# Altium PCB Board.PcbDoc (part 1 of 4)
Units mm, origin at the board's own origin, x right, y up, seen from the top; angles counter-clockwise.
Board outline 88 x 92.5 mm, 2 copper layers (Top Layer, Bottom Layer); 85 components, 67 nets, 346 pads, 106 vias.
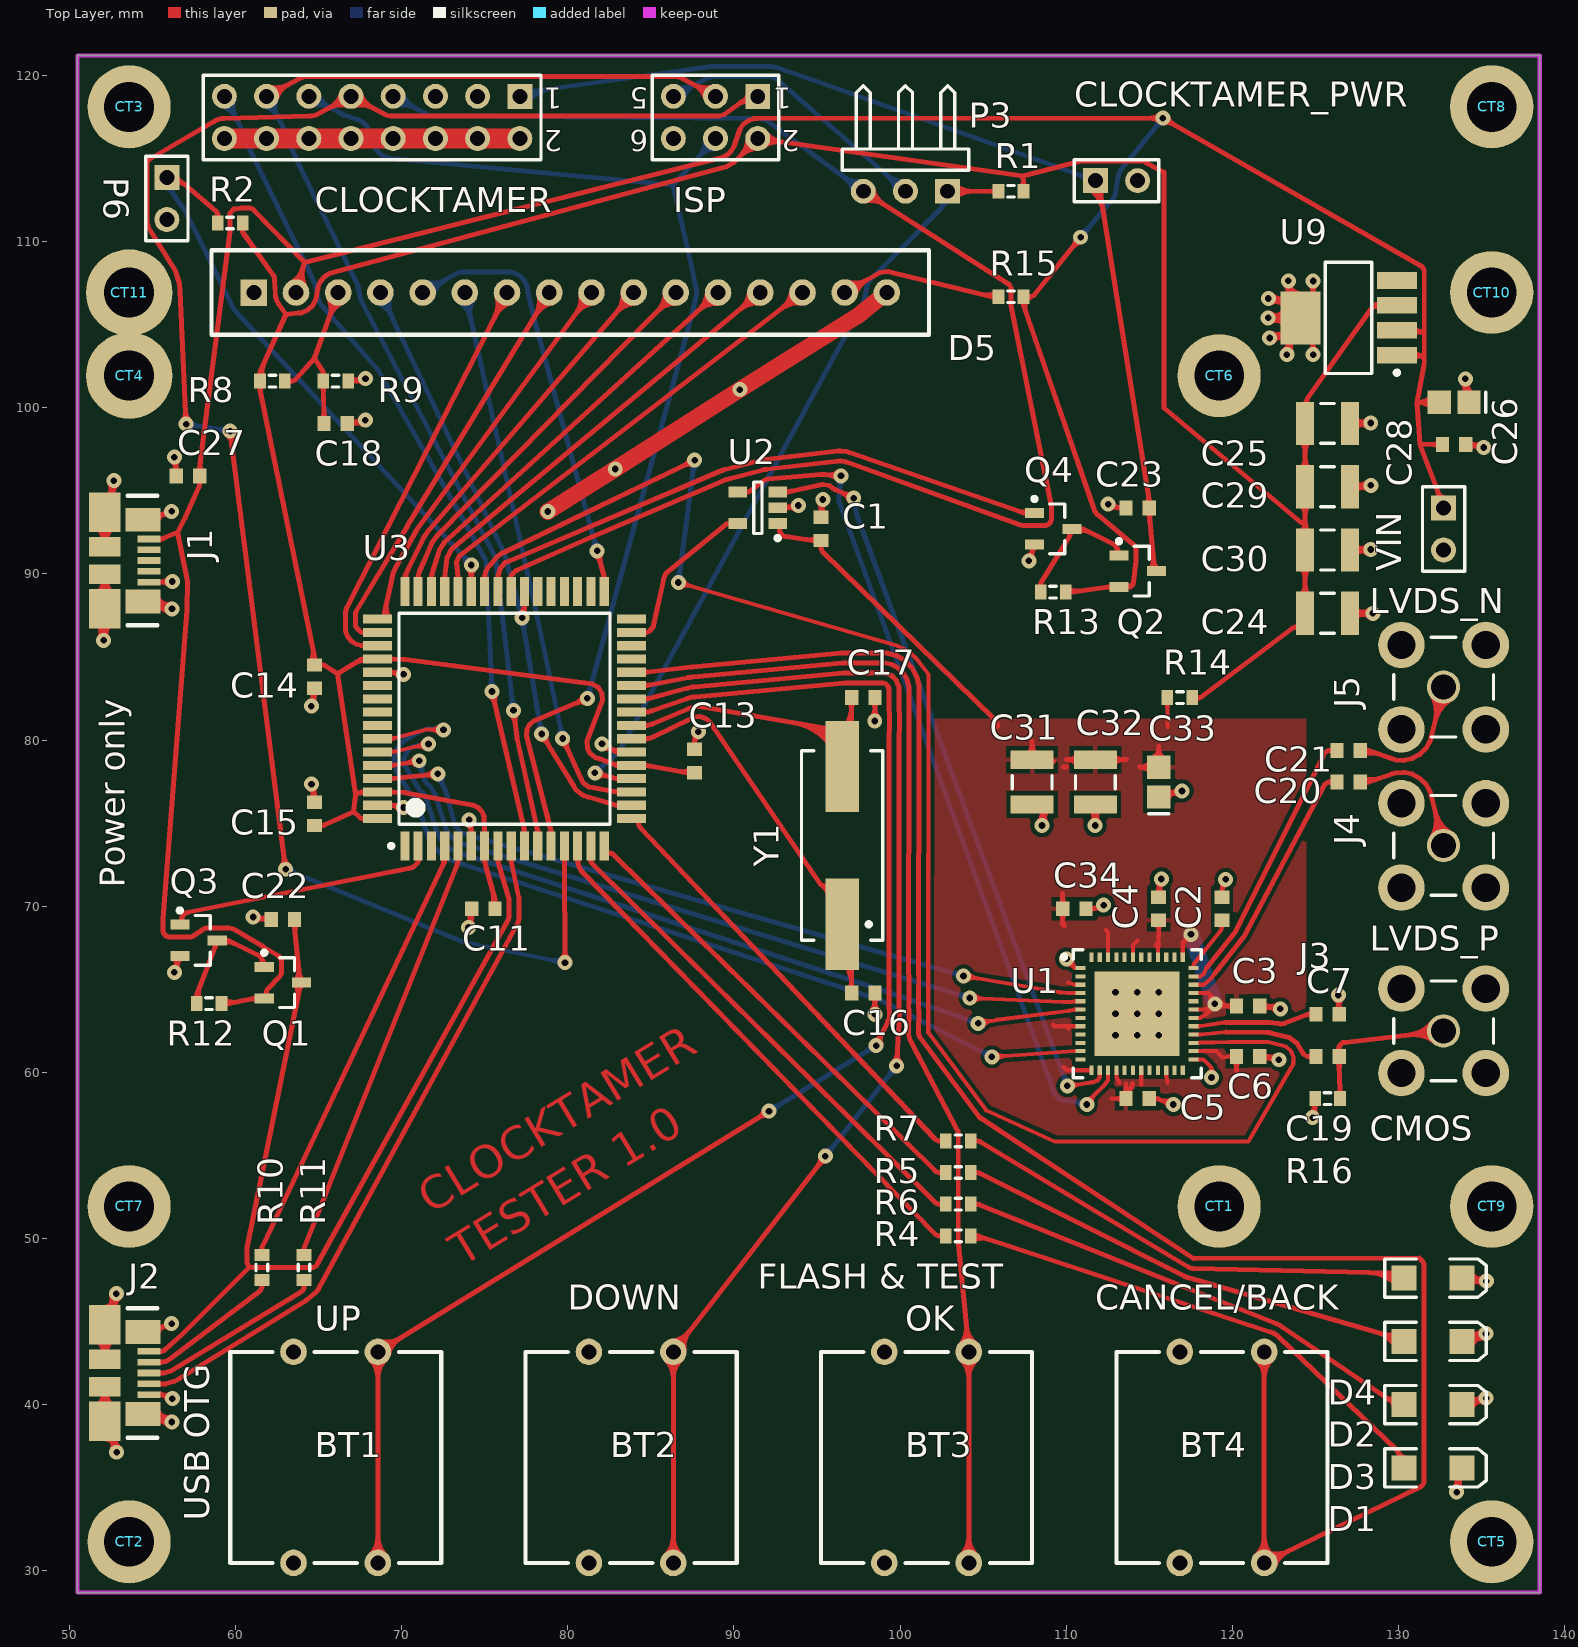
[diagram p0: Top Layer view]
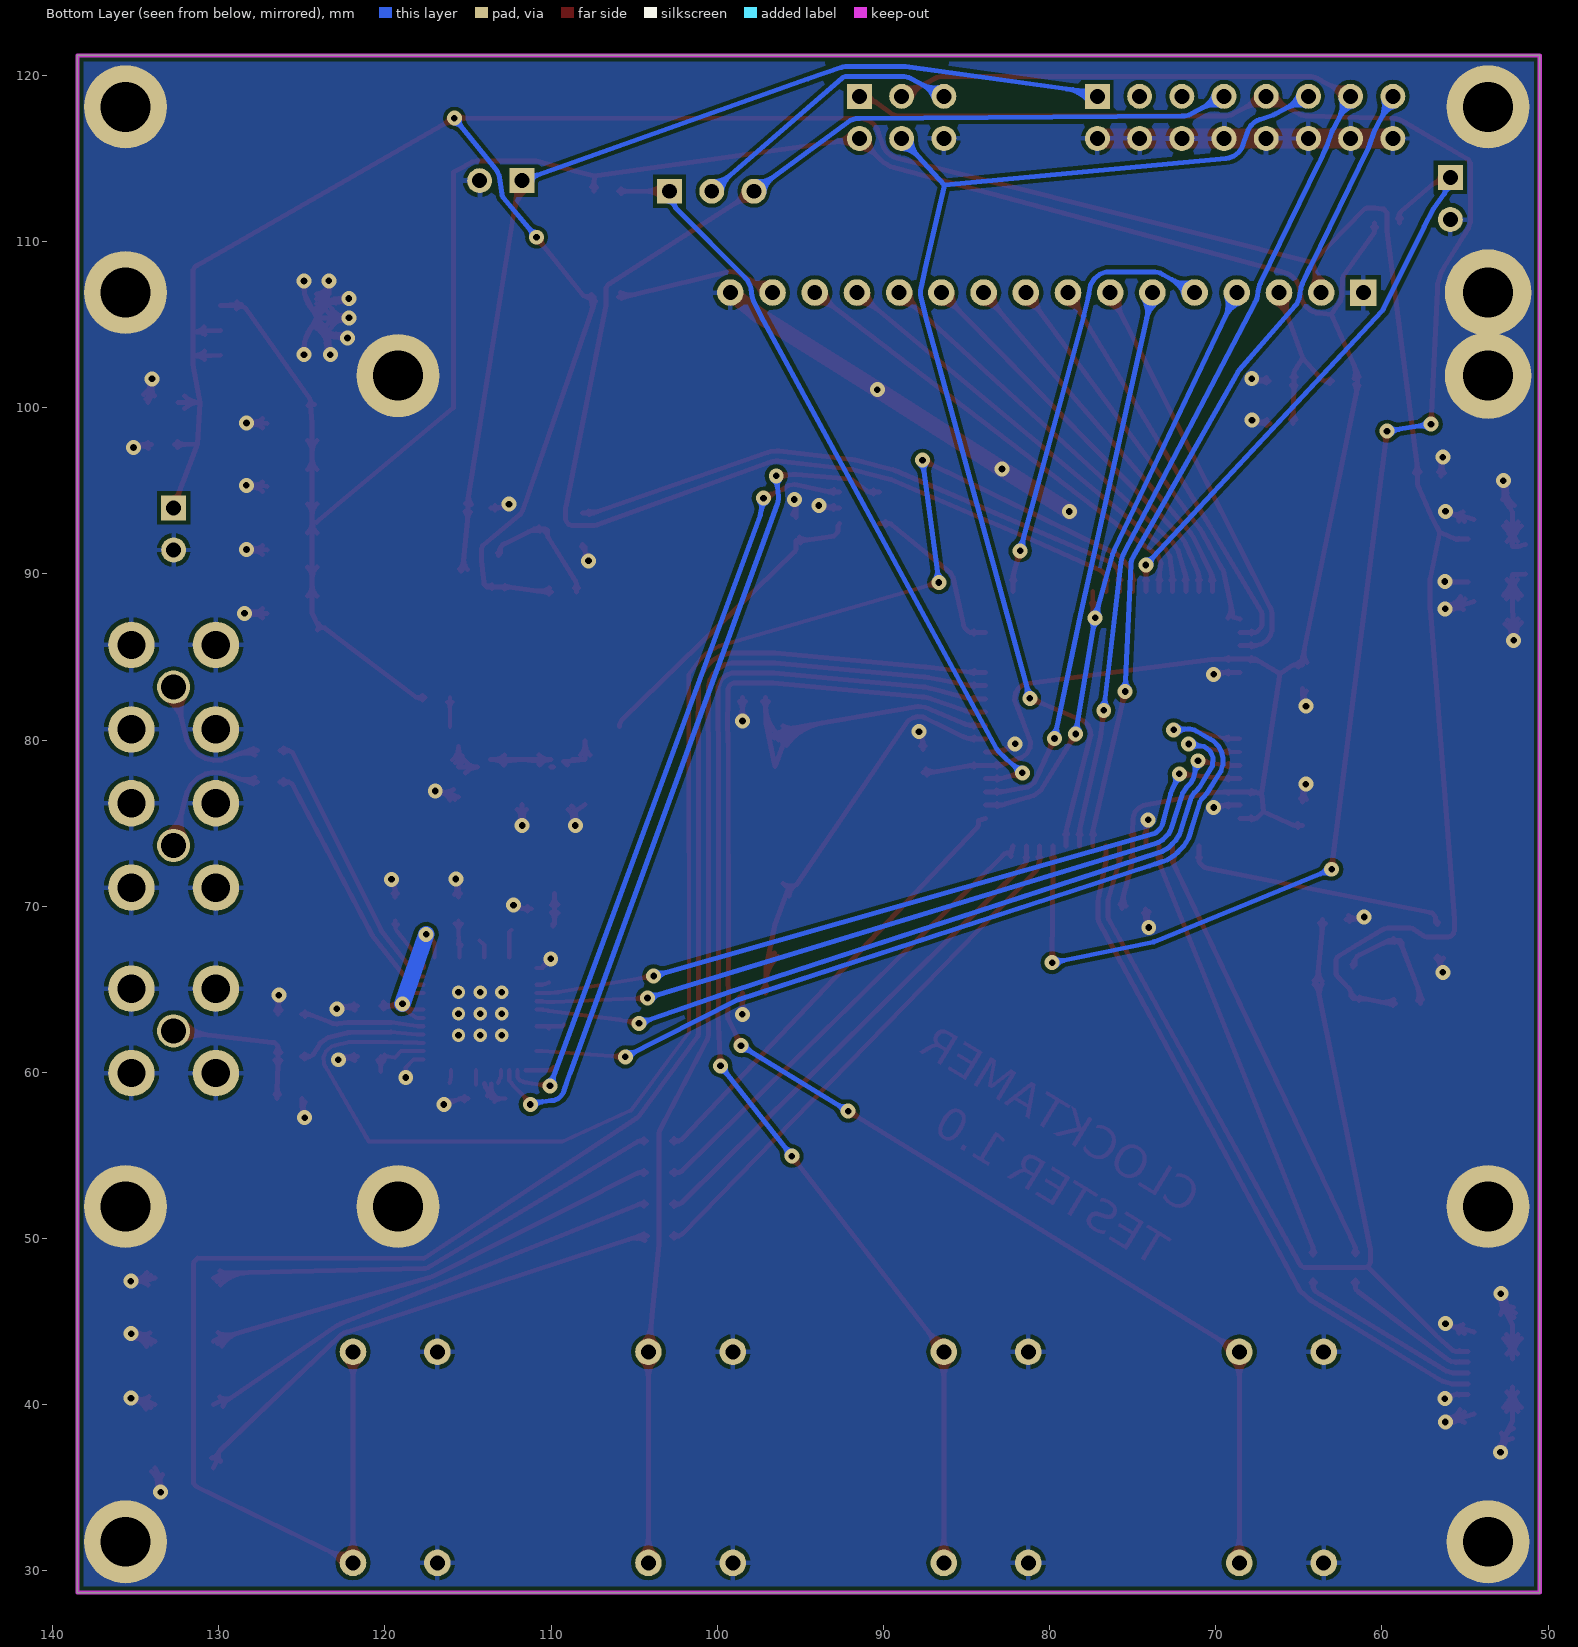
[diagram p1: Bottom Layer view, seen from below]

## Layer stack, top to bottom
Top Layer: signal copper 0.0356
Dielectric: dielectric 0.32, FR-4, Dk 4.8
Bottom Layer: signal copper 0.0356

## Board outline
50.5,28.7 50.5,121.2 138.5,121.2 138.5,28.7

## Design rules (kind name [scope] priority, off if disabled: settings)
Clearance [All] p1: gap=0.24
ComponentClearance [All] p1: gap=0.254 collisioncheckmode=3 verticalgap=0.254 showdistances=TRUE
PlaneConnect [All] p1: planeconnectstyle=Direct reliefexpansion=0.508 reliefentries=4 reliefconductorwidth=0.254 reliefairgap=0.254
PolygonConnect PolygonConnect_CT [(InComponent('CT1') OR InComponent('CT2') OR InComponent('CT3') OR InComponent('CT4') OR InComponent('CT5') OR InComponent('CT6') OR InComponent('CT7')  OR InComponent('CT8')  OR InComponent('CT9')  OR InComponent('CT10')  OR InComponent('CT11')  OR InComponent('CT12'))] p1: connectstyle=Direct reliefconductorwidth=0.254 reliefentries=4 polygonreliefangle="90 Angle" airgapwidth=0.254
PolygonConnect PolygonConnect_1 [IsVia] p2: connectstyle=Direct reliefconductorwidth=0.254 reliefentries=4 polygonreliefangle="90 Angle" airgapwidth=0.254
PolygonConnect [All] p3: connectstyle=Relief reliefconductorwidth=0.3 reliefentries=4 polygonreliefangle="90 Angle" airgapwidth=0.254
RoutingVias [All] p1: holewidth=0.4 width=0.8 viastyle="Through Hole" minholewidth=0.4 minwidth=0.8 maxholewidth=0.4 maxwidth=0.8
SilkscreenOverComponentPads [All] p1: minsilkscreentomaskgap=0.254
SolderMaskExpansion [All] p1: expansion=0.1
Width [All] p1: maxlimit=2 minlimit=0.2 preferedwidth=0.254
25 further rules are at their usual default settings.

## Classes and differential pairs
component class ClockDiv: C1 C2 C3 C4 C5 C6 C7 U1 U2
component class Power: C22 C23 C24 C25 C26 C27 C28 C29 C30 C31 C32 C33 C34 Q1 Q2 Q3 Q4 R12 R13 R14 R15 U9
component class ClockTamerMotherboard: C11 C13 C14 C15 C16 C17 D1 D2 D3 D4 R1 R4 R5 R6 R7 U3 Y1
component class Connectors: BT1 BT2 BT3 BT4 C18 C19 C20 C21 CLOCKTAMER CLOCKTAMER_PWR CT1 CT2 CT3 CT4 CT5 CT6 CT7 CT8 CT9 CT10 CT11 D5 ISP J1 J2 J3 J4 J5 P3 P6 R2 R8 R9 R10 R11 R16 VIN

## Components (designator, comment, footprint, x,y, rotation, side; value= is the part's Value field where it differs from the comment)
BT1 "DTS24N" DTS24N 68.58,30.48 r0 top
BT2 "DTS24N" DTS24N 86.36,30.48 r0 top
BT3 "DTS24N" DTS24N 104.14,30.48 r0 top
BT4 "DTS24N" DTS24N 121.92,30.48 r0 top
C1 "100nF" 1608[0603] 95.25,92.71 r270 top
C2 "100nF" 1608[0603] 119.38,69.85 r270 top
C3 "100nF" 1608[0603] 120.95,64 r180 top
C4 "100nF" 1608[0603] 115.57,69.85 r270 top
C5 "100nF" 1608[0603] 114.3,58.42 r180 top
C6 "100nF" 1608[0603] 120.95,60.96 r180 top
C7 "100pF" 1608[0603] 125.73,63.5 r180 top
C11 "1uF" 1608[0603] 74.93,69.85 r0 top
C13 "100nF" 1608[0603] 87.63,78.74 r90 top
C14 "100nF" 1608[0603] 64.77,83.82 r90 top
C15 "100nF" 1608[0603] 64.77,75.565 r270 top
C16 "22pF" 1608[0603] 97.79,64.77 r180 top
C17 "22pF" 1608[0603] 97.79,82.55 r180 top
C18 "100nF" 1608[0603] 66.04,99.06 r0 top
C19 "100pF" 1608[0603] 125.73,60.96 r180 top
C20 "100pF" 1608[0603] 127,77.47 r180 top
C21 "100pF" 1608[0603] 127,79.375 r180 top
C22 "100nF" 1608[0603] 62.865,69.215 r180 top
C23 "100nF" 1608[0603] 114.3,93.98 r180 top
C24 "10uF" C1210 125.73,87.63 r180 top
C25 "10uF" C1210 125.73,99.06 r180 top
C26 "Tantal" C2512 133.35,100.33 r180 top
C27 "100nF" 1608[0603] 57.15,95.885 r180 top
C28 "100nF" 1608[0603] 133.35,97.79 r0 top
C29 "10uF" C1210 125.73,95.25 r180 top
C30 "10uF" C1210 125.73,91.44 r180 top
C31 "10uF" C1210 107.95,77.47 r90 top
C32 "10uF" C1210 111.76,77.47 r90 top
C33 "Tantal" C2512 115.57,77.47 r90 top
C34 "100nF" 1608[0603] 110.49,69.85 r0 top
CLOCKTAMER "Header 8X2" HDR2X8 77.12,118.745 r180 top (schematic designator P1)
CLOCKTAMER_PWR "Header 2" HDR1X2 111.76,113.665 r0 top (schematic designator P4)
CT1 "MTHOLE_3mm" MTHOLE#1 119.21,51.934 r0 top locked
CT2 "MTHOLE_3mm" MTHOLE#2 46.99,31.75 r0 top
CT3 "MTHOLE_3mm" MTHOLE#2 46.99,118.11 r0 top
CT4 "MTHOLE_3mm" MTHOLE#3 53.61,101.934 r0 top locked
CT5 "MTHOLE_3mm" MTHOLE#4 156.21,31.75 r0 top
CT6 "MTHOLE_3mm" MTHOLE#1 119.21,101.934 r0 top locked
CT7 "MTHOLE_3mm" MTHOLE#1 53.61,51.934 r0 top locked
CT8 "MTHOLE_3mm" MTHOLE#5 156.2,118.11 r0 top
CT9 "MTHOLE_3mm" MTHOLE#1 135.61,51.934 r0 top
CT10 "MTHOLE_3mm" MTHOLE#1 135.61,106.934 r0 top
CT11 "MTHOLE_3mm" MTHOLE#3 53.61,106.934 r0 top
D1 "LED2" 3.2X1.6X1.1 132.08,36.195 r0 top
D2 "LED2" 3.2X1.6X1.1 132.08,43.815 r0 top
D3 "LED2" 3.2X1.6X1.1 132.08,40.005 r0 top
D4 "LED2" 3.2X1.6X1.1 132.08,47.625 r0 top
D5 "WH1604B" WH1604A 105.41,106.934 r0 top locked
ISP "Header 3X2" HDR2X3 91.44,118.745 r180 top (schematic designator P2)
J1 "47346-0001" USB_MICRO 54.81,90.805 r90 top
J2 "47346-0001" USB_MICRO 54.81,41.91 r90 top
J3 "SMA" SMA 132.715,62.5 r0 top
J4 "SMA" SMA 132.715,73.66 r0 top
J5 "SMA" SMA 132.715,83.185 r0 top
P3 "Header 3H" HDR1X3H 102.87,113.03 r180 top
P6 "Header 2" HDR1X2 55.88,113.865 r270 top
Q1 "IRLML6402" SOT-23_N 62.865,65.405 r0 top
Q2 "IRLML6402" SOT-23_N 114.3,90.17 r0 top
Q3 "IRLML2502" SOT-23_N 57.785,67.945 r0 top
Q4 "IRLML2502" SOT-23_N 109.22,92.71 r0 top
R1 "10K" J1-0603 106.68,113.03 r0 top
R2 "10K" J1-0603 59.69,111.125 r180 top
R4 "750" J1-0603 103.505,50.165 r180 top
R5 "750" J1-0603 103.505,53.975 r180 top
R6 "750" J1-0603 103.505,52.07 r180 top
R7 "750" J1-0603 103.505,55.88 r180 top
R8 "10K" J1-0603 62.23,101.6 r180 top
R9 "10K" J1-0603 66.04,101.6 r180 top
R10 "22" J1-0603 61.595,48.26 r90 top
R11 "22" J1-0603 64.135,48.26 r90 top
R12 "10K" J1-0603 58.42,64.135 r0 top
R13 "10K" J1-0603 109.22,88.9 r0 top
R14 "3.3" J1-0603 116.84,82.55 r0 top
R15 "100" J1-0603 106.68,106.68 r0 top
R16 "51" J1-0603 125.73,58.42 r180 top
U1 "LMK03000CISQ" SQ48A-04 114.27,63.53 r0 top
U2 "DS90LT012AQMF" MF05A_N 91.44,93.98 r180 top
U3 "AT90USB1287-AU" 64MD_N 76.2,81.28 r90 top
U9 "LP3871EMP-3.3" MP05A_N 127,105.41 r180 top
VIN "Header 2" HDR1X2 132.715,93.98 r270 top (schematic designator P5)
Y1 "HC49/4H_SMX 8Mhz" HC49/4H_SMX 96.52,73.66 r90 top

## Footprints (in the part's own frame and the unit in brackets; to place one, negate y for a bottom-side part, rotate by r counter-clockwise, add the part's x,y. Pads: shape width x height; smd on the part's side, far side on the other; paste and mask are expansions set on the pad)
3.2X1.6X1.1 [mm] "SMT LED; 2 Flat Leads"
  rect 1.5x1.5 smd: 1(-1.75,0) 2(1.75,0)
  silkscreen extent -2.9,-1.15 3.2,1.15
64MD_N [mm] "Thin QFP, 64-Leads, Body 14x14mm, Pitch 0.8mm, IPC Medium Density"
  rect 1.75x0.55 smd: 1(-7.65,6) 2(-7.65,5.2) 3(-7.65,4.4) 4(-7.65,3.6) 5(-7.65,2.8) 6(-7.65,2) 7(-7.65,1.2) 8(-7.65,0.4) 9(-7.65,-0.4) 10(-7.65,-1.2) 11(-7.65,-2) 12(-7.65,-2.8) 13(-7.65,-3.6) 14(-7.65,-4.4) 15(-7.65,-5.2) 16(-7.65,-6) 33(7.65,-6) 34(7.65,-5.2) 35(7.65,-4.4) 36(7.65,-3.6) 37(7.65,-2.8) 38(7.65,-2) 39(7.65,-1.2) 40(7.65,-0.4) 41(7.65,0.4) 42(7.65,1.2) 43(7.65,2) 44(7.65,2.8) 45(7.65,3.6) 46(7.65,4.4) 47(7.65,5.2) 48(7.65,6)
  rect 0.55x1.75 smd: 17(-6,-7.65) 18(-5.2,-7.65) 19(-4.4,-7.65) 20(-3.6,-7.65) 21(-2.8,-7.65) 22(-2,-7.65) 23(-1.2,-7.65) 24(-0.4,-7.65) 25(0.4,-7.65) 26(1.2,-7.65) 27(2,-7.65) 28(2.8,-7.65) 29(3.6,-7.65) 30(4.4,-7.65) 31(5.2,-7.65) 32(6,-7.65) 49(6,7.65) 50(5.2,7.65) 51(4.4,7.65) 52(3.6,7.65) 53(2.8,7.65) 54(2,7.65) 55(1.2,7.65) 56(0.4,7.65) 57(-0.4,7.65) 58(-1.2,7.65) 59(-2,7.65) 60(-2.8,7.65) 61(-3.6,7.65) 62(-4.4,7.65) 63(-5.2,7.65) 64(-6,7.65)
  silkscreen extent -7.77,-6.35 6.35,6.95, body extent -7,-7 7,7, height 1.2
1608[0603] [mm] "Chip Capacitor, Body 1.6x0.8mm, IPC High Density"
  rect 0.8x0.9 smd: 1(-0.7,0) 2(0.7,0)
  body extent -0.87,-0.48 0.87,0.48, height 1.3
C1210 [mm] "Chip Capacitor, Body 3.2x2.5mm, IPC High Density"
  rect 1.1x2.6 smd: 1(-1.35,0) 2(1.35,0)
  silkscreen extent -0.4,-1.2 0.4,1.2, body extent -1.7,-1.35 1.7,1.35, height 1.3
C2512 [mm] "Chip Capacitor, Body 2.54x1.27mm, IPC High Density"
  rect 1.4x1.4 smd: 1(-0.9,0) 2(0.9,0)
  silkscreen extent -1.9,-0.6 -1.9,0.6, body extent -1.45,-0.82 1.45,0.82, height 1.3
DTS24N [mm]
  round 1.6 hole 0.9: 1(0,12.7) 2(0,0) 3(-5.08,12.7) 4(-5.08,0)
  silkscreen extent -8.89,0 3.81,12.7
HC49/4H_SMX [mm] "Surface Mount Quartz Crystal; Body 13.4 (inc. leads) x 4.9 mm (LxW max)"
  rect 5.5x2 smd: 1(-4.75,0) 2(4.75,0)
  silkscreen extent -5.7,-2.45 5.7,2.45
HDR1X2 [mm] "Connector; Header; 2 Position"
  rect 1.5x1.5 hole 0.9: 1(0,0)
  round 1.5 hole 0.9: 2(2.54,0)
  silkscreen extent -1.27,-1.27 3.81,1.27
HDR1X3H [mm] "Connector; Header; 3 Position; Right Angle"
  rect 1.5x1.5 hole 0.9: 1(0,0)
  round 1.5 hole 0.9: 2(2.54,0) 3(5.08,0)
  silkscreen extent -1.27,-6.35 6.35,-1.27
HDR2X3 [mm] "Connector; Header; 3x2 Position"
  rect 1.5x1.5 hole 0.9: 1(0,0)
  round 1.5 hole 0.9: 2(0,2.54) 3(2.54,0) 4(2.54,2.54) 5(5.08,0) 6(5.08,2.54)
  silkscreen extent -1.27,-1.27 6.35,3.81
HDR2X8 [mm] "Connector; Header; 8x2 Position"
  rect 1.5x1.5 hole 0.9: 1(0,0)
  round 1.5 hole 0.9: 2(0,2.54) 3(2.54,0) 4(2.54,2.54) 5(5.08,0) 6(5.08,2.54) 7(7.62,0) 8(7.62,2.54) 9(10.16,0) 10(10.16,2.54) 11(12.7,0) 12(12.7,2.54) 13(15.24,0) 14(15.24,2.54) 15(17.78,0) 16(17.78,2.54)
  silkscreen extent -1.27,-1.27 19.05,3.81
J1-0603 [mm] "Chip Resistor, Body 1.6x0.8mm, IPC High Density"
  rect 0.7x0.9 smd: 1(-0.75,0) 2(0.75,0)
  silkscreen extent -0.2,-0.35 0.2,0.35, body extent -0.85,-0.48 0.85,0.48, height 0.9
MF05A_N [mm] "SOT23, 5-Leads, Body 2.9x1.6mm, Pitch 0.95mm, Lead Span 2.8mm, IPC Medium Density"
  rect 1.1x0.65 smd: 1(-1.2,0.95) 2(-1.2,0) 3(-1.2,-0.95) 4(1.2,-0.95) 5(1.2,0.95)
  silkscreen extent -1.33,-1.55 0.25,1.95, body extent -0.9,-1.55 0.9,1.55, height 1.19
MP05A_N [mm] "SOT223, 5-Leads, Body 6.5x3.5mm, Pitch 1.5mm, Lead Span 7mm, IPC Medium Density"
  rect 2.4x1 smd: 1(-2.9,2.25) 2(-2.9,0.75) 3(-2.9,-0.75) 4(-2.9,-2.25)
  rect 2.4x3.2 smd: 5(2.9,0)
  silkscreen extent -3.03,-3.35 1.4,3.42, body extent -1.85,-3.35 1.85,3.35, height 1.8
MTHOLE#1 [mm]
  round 5 hole 3: 1(0,0)
MTHOLE#2 [mm]
  round 5 hole 3: 1(6.62,0)
MTHOLE#3 [mm]
  round 5.2 hole 3: 1(0,0)
MTHOLE#4 [mm]
  round 5 hole 3: 1(-20.6,0)
MTHOLE#5 [mm]
  round 5 hole 3: 1(-20.59,0)
SMA [mm]
  round 2 hole 1.5: 1(0,0)
  round 2.8 hole 1.7: 2(-2.54,-2.54) 3(2.54,-2.54) 4(2.54,2.54) 5(-2.54,2.54)
  silkscreen extent -3,-3 3,3
SOT-23_N [mm] "SOT23, 3-Leads, Body 2.9x1.3mm, Pitch 0.95mm, Lead Span 2.3mm, IPC Medium Density"
  rect 1.15x0.6 smd: 1(-1.125,0.95) 2(-1.125,-0.95) 3(1.125,0)
  silkscreen extent -1.25,-1.5 0.7,1.92, body extent -0.7,-1.5 0.7,1.5, height 1.11
SQ48A-04 [mm]
  rect 0.6x0.25 smd paste-0.125 mask+0.075: 1(-3.4,2.75) 2(-3.4,2.25) 3(-3.4,1.75) 4(-3.4,1.25) 5(-3.4,0.75) 6(-3.4,0.25) 7(-3.4,-0.25) 8(-3.4,-0.75) 9(-3.4,-1.25) 10(-3.4,-1.75) 11(-3.4,-2.25) 12(-3.4,-2.75) 25(3.4,-2.75) 26(3.4,-2.25) 27(3.4,-1.75) 28(3.4,-1.25) 29(3.4,-0.75) 30(3.4,-0.25) 31(3.4,0.25) 32(3.4,0.75) 33(3.4,1.25) 34(3.4,1.75) 35(3.4,2.25) 36(3.4,2.75)
  rect 0.25x0.6 smd paste-0.125 mask+0.075: 13(-2.75,-3.4) 14(-2.25,-3.4) 15(-1.75,-3.4) 16(-1.25,-3.4) 17(-0.75,-3.4) 18(-0.25,-3.4) 19(0.25,-3.4) 20(0.75,-3.4) 21(1.25,-3.4) 22(1.75,-3.4) 23(2.25,-3.4) 24(2.75,-3.4) 37(2.75,3.4) 38(2.25,3.4) 39(1.75,3.4) 40(1.25,3.4) 41(0.75,3.4) 42(0.25,3.4) 43(-0.25,3.4) 44(-0.75,3.4) 45(-1.25,3.4) 46(-1.75,3.4) 47(-2.25,3.4) 48(-2.75,3.4)
  rect 5.1x5.1 smd paste-2.55: 49(0,0)
  silkscreen extent -4.52,-3.85 3.85,3.85, body extent -3.55,-3.55 3.55,3.55, height 0.8
USB_MICRO [mm]
  rect 0.4x1.38 smd: 1(1.3,0) 2(0.65,0) 3(0,0) 4(-0.65,0) 5(-1.3,0)
  rect 1.45x2.1 smd: DP0(-2.462,0.36)
  rect 2.375x1.9 smd: DP1(-2.913,2.66) DP4(2.913,2.66)
  rect 1.175x1.9 smd: DP2(-0.837,2.66) DP3(0.837,2.66)
  rect 1.43x2.1 smd: DP5(2.462,0.36)
  silkscreen extent -3.9,-0.5 3.9,1.3
WH1604A [mm] "WH1604A"
  rect 1.6x1.6 hole 0.9: 1(-44.3,0)
  round 1.6 hole 0.9: 2(-41.76,0) 3(-39.22,0) 4(-36.68,0) 5(-34.14,0) 6(-31.6,0) 7(-29.06,0) 8(-26.52,0) 9(-23.98,0) 10(-21.44,0) 11(-18.9,0) 12(-16.36,0) 13(-13.82,0) 14(-11.28,0) 15(-8.74,0) 16(-6.2,0)
  silkscreen extent -46.84,-2.54 -3.66,2.54, body extent -54.53,-57.63 16.43,2.67, height 15

## Part data
C1 C2 C3 C4 C5 C6 C7 C11 C13 C14 C15 C16 C17 C18 C19 C20 C21 C22 C23 C24 C25 C26 C27 C28 C29 C30 C31 C32 C33 C34: library part "Cap Semi", "Capacitor (Semiconductor SIM Model)"
CLOCKTAMER: "Header, 8-Pin, Dual row"
CLOCKTAMER_PWR P6 VIN: "Header, 2-Pin"
D1 D2 D3 D4: "Typical RED, GREEN, YELLOW, AMBER GaAs LED"
ISP: "Header, 3-Pin, Dual row"
J1 J2: "Micro USB Molex"
P3: "Header, 3-Pin, Right Angle"
Q1 Q2: library part IRLML6302, "HEXFET Power MOSFET"
Q3 Q4: library part IRLML2402, "HEXFET Power MOSFET"
R1 R2 R4 R5 R6 R7 R8 R9 R10 R11 R12 R13 R14 R15 R16: library part Res3, "Resistor"
U1: library part LMK03001CISQ, "Precision Clock Conditioner with Integrated VCO"
U2: "Automotive LVDS Differential Line Receiver, 5-pin SOT-23"
U3: "8-bit AVR Microcontroller, 2.7-5.5V, 128KB Flash, 4KB EEPROM, 8KB SRAM, USB OTG Host, 64-pin TQFP, Industrial Grade (-40°C to 85°C)"
U9: "0.8A Fast Ultra Low Dropout Linear Regulators, 5-pin SOT-223"
Y1: library part HC49/4H_SMX, "Surface Mount Quartz Crystal"

## Via types
v1: diameter 0.9, hole 0.4, Top Layer to Bottom Layer, tented both sides, 97 vias
v2: diameter 0.8, hole 0.4, Top Layer to Bottom Layer, tented both sides, 9 vias

## Nets (pads, with @x,y where several pads share a name; then routed paths per layer and width w, separated by ;. In a path a pad name is that pad's centre, name@x,y a point inside that pad or via, vN(x,y) a via of type N, cw(c..) or ccw(c..) an arc to the next point about the centre after c; other vN are vias at no path point)
BTP0: BT1.1 BT1.2 U3.25 | length 102.1
  Top Layer w0.3: BT1.2@68.12,30.94 ccw(c67.011,32.049) 68.58,32.049 ccw(c70.149,32.049) BT1.2@69.04,30.94 ; BT1.1@68.12,42.72 cw(c67.011,41.611) 68.58,41.611 cw(c70.149,41.611) BT1.1@69.04,42.72 ; BT1.2@68.333,30.727 ccw(c67.735,31.325) 68.58,31.325 ccw(c69.425,31.325) BT1.2@68.827,30.727 ; BT1.1@68.333,42.933 cw(c67.735,42.335) 68.58,42.335 cw(c69.425,42.335) BT1.1@68.827,42.933 ; BT1.2@68.58,30.48 BT1.1@68.58,43.18 v1(92.118,57.67) ; BT1.1@68.661,43.52 ccw(c68.857,44.343) 69.3,43.623 ccw(c69.743,42.903) BT1.1@68.92,43.099 ; BT1.1@68.73,43.812 ccw(c69.094,45.339) 69.916,44.003 ccw(c70.739,42.666) BT1.1@69.212,43.03 ; U3.25@83.85,81.68 84.575,81.68 84.725,81.68 84.742,81.68 ; U3.25@84.53,81.776 ccw(c84.761,82.05) 84.85,81.703 ; U3.25@84.54,81.594 cw(c84.742,81.401) 84.742,81.68 ; U3.25@84.54,81.766 ccw(c84.742,81.959) 84.742,81.68 ; v1@91.826,57.74 cw(c91.122,57.908) 91.501,57.291 cw(c91.881,56.674) v1@92.049,57.379 ; v1@98.466,61.895 ccw(c98.226,62.579) 98.879,62.265 ccw(c99.532,61.951) v1@98.849,61.711 ; v1(98.566,61.612) 99.285,63.11 99.339,63.223 99.381,63.469 99.367,63.592 ; 99.367,63.592 99.365,63.612 99.36,63.659 99.353,63.753 99.352,63.802 99.337,64.333 99.336,64.34 99.332,64.44 99.33,64.49 99.33,64.594 99.332,64.648 99.336,64.751 99.337,64.761 99.337,64.78 99.336,64.789 99.332,64.89 99.33,64.94 99.33,65.044 99.332,65.097 99.337,65.2 99.337,65.224 99.326,66.492 99.326,66.515 99.337,79.836 99.337,79.846 99.337,79.866 99.338,79.92 99.371,81.125 99.371,81.176 99.34,82.255 99.339,82.331 99.339,82.505 99.339,82.525 99.34,82.545 99.34,82.551 99.339,82.769 99.339,82.78 99.34,82.999 99.34,83.089 99.272,83.254 99.145,83.381 98.979,83.45 98.89,83.45 98.49,83.45 96.69,83.45 96.68,83.45 96.659,83.449 96.648,83.448 87.663,82.601 87.539,82.589 87.291,82.535 87.17,82.494 85.07,81.763 85.049,81.756 85.007,81.743 84.985,81.738 84.793,81.689 84.777,81.684 84.742,81.68
  Bottom Layer w0.3: v1(92.118,57.67) v1(98.566,61.612) ; v1@92.188,57.962 ccw(c92.358,58.666) 92.736,58.048 ccw(c93.114,57.43) v1@92.41,57.6 ; v1@98.274,61.682 cw(c97.57,61.852) 97.948,61.234 cw(c98.325,60.616) v1@98.495,61.32
BTP1: BT2.1 BT2.2 U3.26 | length 90.7
  Top Layer w0.3: U3.26@83.85,82.48 84.575,82.48 84.725,82.48 84.742,82.48 ; U3.26@84.53,82.576 ccw(c84.761,82.85) 84.85,82.503 ; U3.26@84.54,82.394 cw(c84.742,82.201) 84.742,82.48 ; U3.26@84.54,82.566 ccw(c84.742,82.759) 84.742,82.48 ; BT2.2@85.9,30.94 ccw(c84.791,32.049) 86.36,32.049 ccw(c87.929,32.049) BT2.2@86.82,30.94 ; BT2.1@85.9,42.72 cw(c84.791,41.611) 86.36,41.611 cw(c87.929,41.611) BT2.1@86.82,42.72 ; BT2.2@86.113,30.727 ccw(c85.515,31.325) 86.36,31.325 ccw(c87.205,31.325) BT2.2@86.607,30.727 ; BT2.1@86.113,42.933 cw(c85.515,42.335) 86.36,42.335 cw(c87.205,42.335) BT2.1@86.607,42.933 ; BT2.1@86.279,43.825 ccw(c86.083,45.382) 87.322,44.42 ccw(c88.562,43.457) BT2.1@87.005,43.261 ; BT2.1@86.316,43.527 ccw(c86.211,44.366) 86.878,43.847 ccw(c87.546,43.329) BT2.1@86.707,43.224 ; BT2.2@86.36,30.48 BT2.1@86.36,43.18 v1(95.505,54.961) ; v1@95.207,54.924 cw(c94.488,54.833) 95.061,54.389 cw(c95.633,53.945) v1@95.542,54.664 ; 98.49,84.05 96.69,84.05 96.666,84.05 96.617,84.048 96.591,84.045 87.606,83.198 87.494,83.187 87.271,83.147 87.164,83.119 84.996,82.541 84.985,82.538 84.793,82.489 84.777,82.484 84.742,82.48 ; 98.49,84.05 98.891,84.05 99.1,84.05 99.486,83.889 99.781,83.593 99.94,83.207 99.94,82.998 99.939,82.778 99.939,82.772 99.94,82.551 99.94,82.542 99.939,82.511 99.939,82.502 99.939,82.328 99.939,82.286 99.963,81.182 99.963,81.119 99.937,79.891 99.937,79.863 99.937,79.843 99.937,79.836 99.926,66.515 99.926,66.502 99.934,65.227 99.934,65.189 99.929,65.046 99.929,64.943 99.933,64.8 99.933,64.739 99.929,64.597 99.929,64.493 99.933,64.35 99.934,64.331 99.939,63.85 99.939,63.808 99.944,63.719 99.949,63.676 99.951,63.656 99.958,63.597 99.961,63.476 99.958,63.417 v1(99.8,60.399) ; v1@99.599,60.622 ccw(c99.114,61.16) 99.838,61.122 ccw(c100.561,61.084) v1@100.022,60.6
  Bottom Layer w0.3: v1@95.47,55.259 ccw(c95.385,55.978) 95.954,55.53 ccw(c96.522,55.081) v1@95.803,54.996 ; v1(95.505,54.961) v1(99.8,60.399) ; v1@99.502,60.364 cw(c98.782,60.28) 99.351,59.831 cw(c99.919,59.382) v1@99.834,60.101
BTP2: BT3.1 BT3.2 U3.27 | length 83.2
  Top Layer w0.3: U3.27@83.85,83.28 84.575,83.28 84.725,83.28 84.738,83.28 ; U3.27@84.52,83.383 ccw(c84.798,83.791) 84.89,83.306 ; U3.27@84.541,83.195 cw(c84.738,83.011) 84.738,83.28 ; U3.27@84.541,83.365 ccw(c84.738,83.549) 84.738,83.28 ; 100.523,62.538 100.522,62.413 100.522,62.271 100.591,61.992 100.657,61.867 103.459,56.516 103.482,56.472 103.505,56.378 103.505,56.33 103.505,49.715 103.505,49.705 103.506,49.686 103.507,49.676 BT3.1@104.14,43.18 BT3.2@104.14,30.48 ; 100.523,62.538 100.523,62.616 100.523,62.65 100.547,63.432 100.549,63.504 100.543,63.648 100.536,63.721 100.533,63.741 100.529,63.776 100.526,63.846 100.526,63.88 100.53,64.304 100.53,64.348 100.527,64.524 100.527,64.565 100.53,64.741 100.53,64.798 100.527,64.974 100.527,65.016 100.531,65.19 100.531,65.226 100.526,66.508 100.526,66.514 100.537,79.835 100.537,79.84 100.537,79.86 100.537,79.871 100.555,81.121 100.555,81.178 100.539,82.308 100.539,82.326 100.539,82.5 100.539,82.507 100.539,82.538 100.539,82.552 100.539,82.773 100.539,82.776 100.54,82.998 100.54,83.215 100.428,83.635 100.211,84.011 99.905,84.319 99.529,84.536 99.109,84.649 98.892,84.65 98.492,84.65 98.49,84.65 96.69,84.65 96.653,84.65 96.575,84.646 96.535,84.643 87.55,83.795 87.476,83.788 87.322,83.767 87.246,83.752 84.776,83.285 84.763,83.282 84.738,83.28 ; BT3.1@103.638,43.593 ccw(c102.426,44.59) 103.988,44.742 ccw(c105.55,44.894) BT3.1@104.553,43.682 ; BT3.2@103.68,30.94 ccw(c102.571,32.049) 104.14,32.049 ccw(c105.709,32.049) BT3.2@104.6,30.94 ; BT3.1@103.68,42.72 cw(c102.571,41.611) 104.14,41.611 cw(c105.709,41.611) BT3.1@104.6,42.72 ; BT3.1@103.87,43.402 ccw(c103.217,43.939) 104.058,44.021 ccw(c104.899,44.103) BT3.1@104.362,43.45 ; BT3.2@103.893,30.727 ccw(c103.295,31.325) 104.14,31.325 ccw(c104.985,31.325) BT3.2@104.387,30.727 ; BT3.1@103.893,42.933 cw(c103.295,42.335) 104.14,42.335 cw(c104.985,42.335) BT3.1@104.387,42.933
BTP3: BT4.1 BT4.2 U3.28 | length 123.8
  Top Layer w0.3: U3.28@83.85,84.08 84.575,84.08 84.725,84.08 84.733,84.08 ; U3.28@84.528,84.178 ccw(c84.786,84.502) 84.832,84.09 ; U3.28@84.542,83.996 cw(c84.733,83.823) 84.733,84.08 ; U3.28@84.542,84.164 ccw(c84.733,84.337) 84.733,84.08 ; 101.139,82.774 101.139,82.55 101.139,82.54 101.139,82.501 101.139,82.499 101.139,82.325 101.139,82.32 101.146,81.183 101.146,81.181 101.146,81.176 101.146,81.131 101.137,79.858 101.137,79.857 101.137,79.837 101.137,79.835 101.126,66.514 101.126,66.512 101.128,65.223 101.128,65.2 101.126,64.999 101.126,64.99 101.127,64.787 101.127,64.75 101.126,64.549 101.126,64.54 101.127,64.337 101.127,64.302 101.124,63.874 101.124,63.872 101.124,63.852 101.124,63.825 101.133,63.605 101.135,63.455 101.123,62.623 101.123,62.615 101.123,62.538 101.123,62.412 101.123,62.319 101.181,62.143 101.236,62.069 104.719,57.376 104.749,57.336 104.822,57.267 104.864,57.239 117.662,48.803 131.266,48.825 131.398,48.693 131.461,48.63 131.53,48.465 131.53,48.375 131.53,35.445 131.53,35.316 131.393,35.097 131.277,35.04 BT4.2@121.92,30.48 BT4.1@121.92,43.18 ; 101.139,82.775 101.14,82.998 101.14,83.294 100.987,83.866 100.691,84.38 100.273,84.799 99.76,85.095 99.188,85.249 98.893,85.249 98.493,85.25 98.49,85.25 96.69,85.25 96.639,85.25 96.533,85.245 96.479,85.24 87.494,84.393 87.419,84.385 84.756,84.082 84.748,84.081 84.733,84.08 ; BT4.2@121.46,30.94 ccw(c120.351,32.049) 121.92,32.049 ccw(c123.489,32.049) BT4.2@122.38,30.94 ; BT4.1@121.46,42.72 cw(c120.351,41.611) 121.92,41.611 cw(c123.489,41.611) BT4.1@122.38,42.72 ; BT4.2@121.673,30.727 ccw(c121.075,31.325) 121.92,31.325 ccw(c122.765,31.325) BT4.2@122.167,30.727 ; BT4.1@121.673,42.933 cw(c121.075,42.335) 121.92,42.335 cw(c122.765,42.335) BT4.1@122.167,42.933 ; BT4.2@122.034,30.811 ccw(c122.309,31.61) 122.68,30.85 ccw(c123.05,30.091) BT4.2@122.251,30.366 ; BT4.2@122.132,31.095 ccw(c122.643,32.578) 123.331,31.168 ccw(c124.018,29.757) BT4.2@122.535,30.268
CLKIN0_N: C7.2 U1.29 | length 8
  Top Layer w0.25: U1.29@117.67,62.78 117.845,62.78 117.97,62.78 118.004,62.78 118.069,62.785 118.101,62.79 119.599,63.017
  Top Layer w0.3: 119.599,63.017 119.601,63.017 119.625,63.017 122.055,63.01 122.102,63.01 122.199,63.004 122.246,62.998 122.779,62.932 122.889,62.918 123.11,62.946 123.214,62.986 124.468,63.47 124.507,63.485 124.588,63.5 ; C7.2@124.816,63.371 ccw(c124.588,63.235) 124.588,63.5 ; C7.2@124.816,63.629 cw(c124.588,63.765) 124.588,63.5 ; C7.2@125.03,63.5 124.78,63.5 124.63,63.5 124.588,63.5
CLKIN0_P: C19.2 U1.28 | length 8.7
  Top Layer w0.25: U1.28@117.67,62.28 117.845,62.28 117.97,62.28 118.004,62.28 118.071,62.283 118.105,62.287 119.623,62.436
  Top Layer w0.3: 119.623,62.436 122.061,62.41 122.118,62.409 122.233,62.395 122.289,62.381 123.149,62.17 123.43,62.101 123.896,61.757 124.046,61.509 124.244,61.178 124.305,61.077 124.511,60.96 ; C19.2@124.834,60.804 ccw(c124.511,60.546) 124.511,60.96 ; C19.2@124.834,61.116 cw(c124.512,61.373) 124.511,60.96 ; C19.2@125.03,60.96 124.78,60.96 124.63,60.96 124.511,60.96
CLKIN1_N: C21.2 U1.35 | length 17.4
  Top Layer w0.25: U1.35@117.67,65.78 117.845,65.78 117.97,65.78 118.078,65.78 118.262,65.896 118.308,65.993 118.45,66.29
  Top Layer w0.3: 118.45,66.29 120.182,68.47 120.197,68.488 120.222,68.528 120.233,68.549 125.497,79.126 125.554,79.24 125.772,79.375 ; C21.2@126.107,79.217 ccw(c125.772,78.942) 125.772,79.375 ; C21.2@126.107,79.533 cw(c125.772,79.808) 125.772,79.375 ; C21.2@126.3,79.375 126.05,79.375 125.9,79.375 125.772,79.375
CLKIN1_P: C20.2 U1.34 | length 16.3
  Top Layer w0.25: U1.34@117.67,65.28 U1.34@117.851,65.28 ; U1.34@117.861,65.27 U1.34@117.851,65.28 ; 118.96,65.96 118.735,65.675 118.696,65.626 118.605,65.538 118.555,65.5 118.495,65.455 118.382,65.37 118.292,65.28 U1.34@117.851,65.28
  Top Layer w0.3: 118.96,65.96 120.653,68.098 120.683,68.136 120.736,68.217 120.758,68.259 125.502,77.23 125.561,77.341 125.775,77.47 ; C20.2@126.106,77.312 ccw(c125.775,77.044) 125.775,77.47 ; C20.2@126.106,77.627 cw(c125.776,77.895) 125.775,77.47 ; C20.2@126.3,77.47 125.9,77.47 125.775,77.47
COUT_N: U1.15 U2.4 | length 55.4
  Top Layer w0.25: v1(111.243,58.071) 111.651,58.593 ; v1@111.245,58.396 ccw(c111.248,58.908) 111.651,58.593 ; v1@111.558,58.152 cw(c112.053,58.278) 111.651,58.593 ; U1.15@112.52,60.13 112.52,59.955 112.52,59.83 112.52,59.509 112.43,59.418 112.345,59.305 112.3,59.245 112.277,59.214 112.225,59.156 112.197,59.128 111.709,58.657 111.693,58.642 111.664,58.61 111.651,58.593
  Top Layer w0.3: U2.4@90.24,94.93 90.64,94.93 90.79,94.93 90.843,94.93 ; U2.4@90.599,94.817 cw(c90.843,94.61) 90.843,94.93 ; U2.4@90.599,95.043 ccw(c90.843,95.25) 90.843,94.93 ; v1@96.219,95.704 ccw(c95.667,95.234) 95.725,95.956 ccw(c95.782,96.678) v1@96.252,96.127 ; v1(96.447,95.898) 95.479,95.975 95.416,95.98 95.293,95.98 95.233,95.975 92.052,95.703 91.99,95.698 91.872,95.654 91.822,95.616 90.984,94.994 90.942,94.963 90.843,94.93
  Bottom Layer w0.3: v1@96.214,95.709 cw(c95.654,95.25) 96.374,95.178 cw(c97.095,95.105) v1@96.637,95.666 ; v1(96.447,95.898) 96.321,94.648 96.311,94.547 96.336,94.345 96.371,94.249 108.866,59.948 108.872,59.932 109.215,58.906 109.256,58.783 109.403,58.571 109.603,58.409 109.841,58.31 109.97,58.296 110.524,58.235 110.543,58.233 110.582,58.226 110.601,58.222 ; v1@110.978,57.931 ccw(c110.47,57.662) 110.601,58.222 ; v1@111.068,58.315 cw(c110.732,58.782) 110.601,58.222 ; v1(111.243,58.071) 110.601,58.222
COUT_P: U1.14 U2.3 | length 50.6
  Top Layer w0.25: v1(110.068,59.191) 110.717,59.268 ; v1@110.302,59.416 ccw(c110.659,59.758) 110.717,59.268 ; v1@110.349,59.027 cw(c110.775,58.777) 110.717,59.268 ; 111.957,59.622 ccw(c111.586,59.865) U1.14@112.02,59.955 ; U1.14@112.02,60.13 U1.14@112.02,59.955 ; 110.717,59.268 110.745,59.272 111.589,59.411 111.615,59.415 111.666,59.43 111.69,59.441 111.795,59.486 111.898,59.531 112.02,59.718 112.02,59.83 U1.14@112.02,59.955
  Top Layer w0.3: U2.3@92.64,94.93 93.04,94.93 93.19,94.93 93.208,94.93 ; U2.3@92.96,95.077 ccw(c93.329,95.652) 93.475,94.984 ; U2.3@93.007,94.827 cw(c93.208,94.682) 93.208,94.93 ; U2.3@93.007,95.033 ccw(c93.208,95.178) 93.208,94.93 ; 95.903,95.189 95.943,95.159 96.027,95.108 96.071,95.088 v1(97.216,94.557) ; 95.903,95.189 95.748,95.309 95.363,95.395 95.17,95.353 93.259,94.937 93.242,94.934 93.208,94.93 ; v1@96.935,94.454 ccw(c96.255,94.205) 96.559,94.862 ccw(c96.863,95.519) v1@97.113,94.839
  Bottom Layer w0.3: v1@97.046,94.311 cw(c96.635,93.714) 97.347,93.845 cw(c98.06,93.976) v1@97.463,94.387 ; v1(97.216,94.557) 97.386,93.632 97.392,93.604 97.406,93.551 97.416,93.525 v1(110.068,59.191) ; v1@109.796,59.316 ccw(c109.138,59.62) 109.818,59.87 ccw(c110.497,60.121) v1@110.194,59.463
CS_CT: CLOCKTAMER.15 U3.10 | length 55.1
  Top Layer w0.3: v1@75.29,82.666 cw(c74.907,82.051) 75.612,82.215 cw(c76.318,82.38) v1@75.703,82.762 ; v1(75.448,82.921) 77.393,74.567 77.396,74.552 77.4,74.521 ; U3.10@77.294,74.296 ccw(c76.836,74.581) 77.361,74.703 ; U3.10@77.314,74.321 ccw(c77.124,74.521) 77.4,74.521 ; U3.10@77.4,73.63 77.4,74.355 77.4,74.505 77.4,74.521 ; U3.10@77.486,74.321 cw(c77.676,74.521) 77.4,74.521
  Bottom Layer w0.3: CLOCKTAMER.15@59.166,118.171 cw(c58.748,116.784) 60.024,117.468 cw(c61.301,118.153) CLOCKTAMER.15@59.914,118.571 ; CLOCKTAMER.15@59.34,118.745 60.398,116.772 60.42,116.73 60.458,116.643 60.474,116.598 60.746,115.812 60.758,115.778 60.786,115.711 60.802,115.679 64.32,108.469 64.326,108.456 64.786,107.456 64.819,107.385 64.866,107.232 64.88,107.155 64.96,106.713 64.99,106.547 65.136,106.242 65.246,106.115 68.571,102.279 68.592,102.255 68.63,102.202 68.645,102.174 74.036,92.677 74.038,92.674 74.985,90.979 75.036,90.888 75.094,90.687 75.099,90.581 v1(75.448,82.921) ; v1@75.227,83.123 ccw(c74.692,83.611) 75.415,83.644 ccw(c76.139,83.677) v1@75.65,83.142
D_RS: D5.4 U3.18 U3.39 | length 48.5
  Top Layer w0.3: v1@77.116,87.623 ccw(c76.847,88.113) 77.394,87.998 ; v1(77.26,87.36) 77.394,87.999 ; U3.39@77.295,88.262 cw(c76.864,87.98) 77.368,87.875 ; U3.39@77.314,88.239 cw(c77.128,88.041) 77.4,88.041 ; U3.39@77.4,88.93 77.4,88.205 77.4,88.055 77.4,88.041 ; U3.39@77.486,88.239 ccw(c77.672,88.041) 77.4,88.041 ; v1@77.498,87.543 cw(c77.942,87.883) 77.394,87.998 ; v1@78.36,80.077 cw(c78.193,79.373) 78.809,79.753 cw(c79.426,80.133) v1@78.721,80.3 ; v1(78.429,80.369) 80.36,77.237 80.504,77.003 80.943,76.666 81.208,76.587 82.675,76.149 82.715,76.138 82.907,76.089 82.924,76.084 82.958,76.08 ; 82.85,76.103 ccw(c82.939,76.45) U3.18@83.17,76.176 ; U3.18@83.16,75.994 ccw(c82.958,75.801) 82.958,76.08 ; U3.18@83.16,76.166 cw(c82.958,76.359) 82.958,76.08 ; U3.18@83.85,76.08 83.125,76.08 82.975,76.08 82.958,76.08 ; 77.394,87.999 77.397,88.013 77.4,88.041
  Bottom Layer w0.3: D5.4@68.512,106.322 cw(c67.987,104.843) 69.404,105.517 cw(c70.821,106.191) D5.4@69.342,106.716 ; D5.4@68.613,106.604 cw(c68.33,105.808) 69.093,106.171 cw(c69.856,106.534) D5.4@69.06,106.817 ; D5.4@68.73,106.934 76.097,91.442 76.135,91.361 76.199,91.189 76.224,91.101 v1(77.26,87.36) v1(78.429,80.369) ; v1@76.999,87.508 ccw(c76.369,87.865) 77.067,88.058 ccw(c77.765,88.251) v1@77.408,87.621 ; v1@77.086,87.116 cw(c76.665,86.526) 77.379,86.646 cw(c78.094,86.765) v1@77.504,87.186 ; v1@78.185,80.544 ccw(c77.595,80.964) 78.31,81.084 ccw(c79.024,81.203) v1@78.603,80.614
DD0: D5.7 U3.51 | length 29.6
  Top Layer w0.3: 67.55,85.703 ccw(c67.639,86.05) U3.51@67.87,85.776 ; U3.51@67.86,85.594 ccw(c67.658,85.401) 67.658,85.68 ; U3.51@67.86,85.766 cw(c67.658,85.959) 67.658,85.68 ; U3.51@68.55,85.68 67.825,85.68 67.675,85.68 67.658,85.68 ; D5.7@75.732,106.733 cw(c74.24,106.246) 75.639,105.535 cw(c77.038,104.824) D5.7@76.551,106.316 ; D5.7@76.017,106.826 cw(c75.214,106.564) 75.967,106.181 cw(c76.72,105.798) D5.7@76.458,106.601 ; D5.7@76.35,106.934 66.739,88.031 66.683,87.921 66.625,87.679 66.625,87.555 66.625,86.755 66.625,86.579 66.739,86.249 66.953,85.973 67.245,85.781 67.415,85.738 67.607,85.689 67.624,85.684 67.658,85.68
DD1: D5.8 U3.50 | length 29.3
  Top Layer w0.3: 67.633,86.474 ccw(c67.698,86.629) U3.50@67.842,86.544 ; U3.50@67.862,86.392 ccw(c67.648,86.178) 67.648,86.48 ccw(c67.648,86.782) U3.50@67.862,86.568 ; U3.50@68.55,86.48 67.825,86.48 67.675,86.48 67.62,86.48 67.517,86.523 67.479,86.562 67.354,86.69 67.292,86.753 67.225,86.917 67.225,87.005 67.225,87.555 67.225,87.616 67.258,87.734 67.289,87.787 70.345,92.861 70.354,92.876 D5.8@78.89,106.934 ; D5.8@78.259,106.78 cw(c76.734,106.407) 78.076,105.593 cw(c79.417,104.778) D5.8@79.044,106.303 ; D5.8@78.55,106.851 cw(c77.729,106.65) 78.451,106.212 cw(c79.174,105.773) D5.8@78.973,106.594
DD2: D5.9 U3.49 | length 28.5
  Top Layer w0.3: U3.49@68.55,87.28 68.975,87.405 68.975,87.555 68.975,87.579 68.98,87.626 68.985,87.65 69.498,90.017 69.513,90.089 69.565,90.226 69.601,90.29 70.79,92.433 70.851,92.542 70.987,92.754 71.06,92.853 D5.9@81.43,106.934 ; 69.102,88.191 ccw(c70.196,87.954) U3.49@69.255,87.348 ; D5.9@80.787,106.836 cw(c79.236,106.601) 80.499,105.67 cw(c81.763,104.74) D5.9@81.528,106.291 ; D5.9@81.084,106.881 cw(c80.249,106.755) 80.929,106.254 cw(c81.609,105.753) D5.9@81.483,106.588
DD3: D5.10 U3.48 | length 27.8
  Top Layer w0.3: U3.48@70.112,89.618 ccw(c69.898,89.832) 70.2,89.832 ccw(c70.502,89.832) U3.48@70.288,89.618 ; U3.48@70.2,88.93 70.2,89.655 70.2,89.805 70.2,89.835 70.213,89.894 70.226,89.921 70.369,90.228 70.378,90.246 71.239,91.997 71.332,92.186 71.564,92.537 71.7,92.694 D5.10@83.97,106.934 ; U3.48@70.314,89.581 cw(c70.906,89.846) 70.318,90.12 ; D5.10@83.322,106.886 cw(c81.757,106.77) 82.946,105.745 cw(c84.134,104.721) D5.10@84.018,106.286 ; D5.10@83.621,106.908 cw(c82.778,106.845) 83.418,106.294 cw(c84.059,105.742) D5.10@83.996,106.585
DD4: D5.11 U3.47 | length 28.7
  Top Layer w0.3: U3.47@70.914,89.62 ccw(c70.721,89.822) 71,89.822 ; U3.47@71,88.93 71,89.655 71,89.805 71,89.822 ; 71.023,89.93 ccw(c71.37,89.841) U3.47@71.096,89.61 ; U3.47@71.086,89.62 cw(c71.279,89.822) 71,89.822 ; D5.11@85.86,106.928 cw(c84.291,106.913) 85.411,105.814 cw(c86.531,104.715) D5.11@86.516,106.284 ; D5.11@86.16,106.931 cw(c85.315,106.923) 85.918,106.331 cw(c86.521,105.739) D5.11@86.513,106.584 ; D5.11@86.51,106.934 72.273,92.431 72.101,92.256 71.826,91.849 71.728,91.626 71.114,90.227 71.097,90.189 71.069,90.107 71.058,90.065 71.009,89.873 71.004,89.856 71,89.822
DD5: D5.12 U3.46 | length 30
  Top Layer w0.3: U3.46@71.714,89.62 ccw(c71.521,89.822) 71.8,89.822 ; U3.46@71.8,88.93 71.8,89.655 71.8,89.805 71.8,89.822 ; 71.823,89.93 ccw(c72.17,89.841) U3.46@71.896,89.61 ; U3.46@71.886,89.62 cw(c72.079,89.822) 71.8,89.822 ; D5.12@88.401,106.964 cw(c86.833,107.035) 87.891,105.876 cw(c88.949,104.717) D5.12@89.02,106.285 ; D5.12@88.7,106.95 cw(c87.856,106.989) 88.426,106.364 cw(c88.995,105.74) D5.12@89.034,106.584 ; D5.12@89.05,106.934 72.785,92.091 72.577,91.902 72.275,91.426 72.193,91.158 71.871,90.114 71.858,90.065 71.809,89.873 71.804,89.856 71.8,89.822
DD6: D5.13 U3.45 | length 31.4
  Top Layer w0.3: U3.45@72.516,89.622 ccw(c72.341,89.813) 72.6,89.813 ; U3.45@72.6,88.93 72.6,89.655 72.6,89.805 72.6,89.813 ; 72.612,89.919 ccw(c73.033,89.868) U3.45@72.699,89.607 ; U3.45@72.684,89.622 cw(c72.859,89.813) 72.6,89.813 ; D5.13@90.943,106.994 cw(c89.38,107.138) 90.383,105.931 cw(c91.386,104.724) D5.13@91.53,106.287 ; D5.13@91.241,106.966 cw(c90.4,107.044) 90.94,106.394 cw(c91.48,105.744) D5.13@91.558,106.585 ; D5.13@91.59,106.934 73.242,91.694 73.021,91.511 72.747,91.009 72.711,90.724 72.602,89.839 72.601,89.83 72.6,89.813
DD7: D5.14 U3.44 | length 32.8
  Top Layer w0.3: U3.44@73.302,89.608 ccw(c72.979,89.865) 73.39,89.912 ; U3.44@73.316,89.622 ccw(c73.143,89.813) 73.4,89.813 ; U3.44@73.4,88.93 73.4,89.655 73.4,89.805 73.4,89.813 ; U3.44@73.484,89.622 cw(c73.657,89.813) 73.4,89.813 ; D5.14@93.486,107.019 cw(c91.93,107.224) 92.885,105.979 cw(c93.84,104.734) D5.14@94.045,106.29 ; D5.14@93.783,106.98 cw(c92.945,107.09) 93.46,106.42 cw(c93.974,105.749) D5.14@94.084,106.587 ; D5.14@94.13,106.934 73.667,91.235 73.484,91.095 73.304,90.671 73.33,90.441 73.398,89.836 73.399,89.828 73.4,89.813